# EAGLE board MOSFET_Driver_8_24_2505D (EAGLE 6.1)
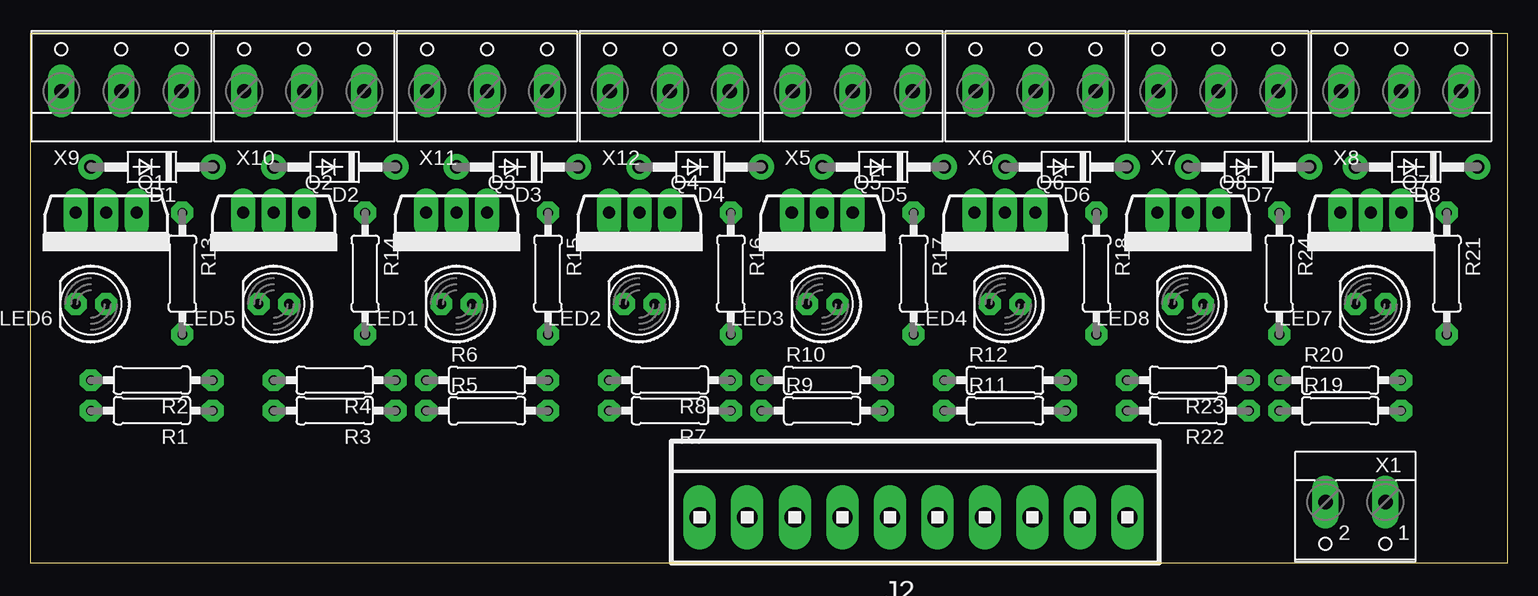
[diagram p0: board, top side]
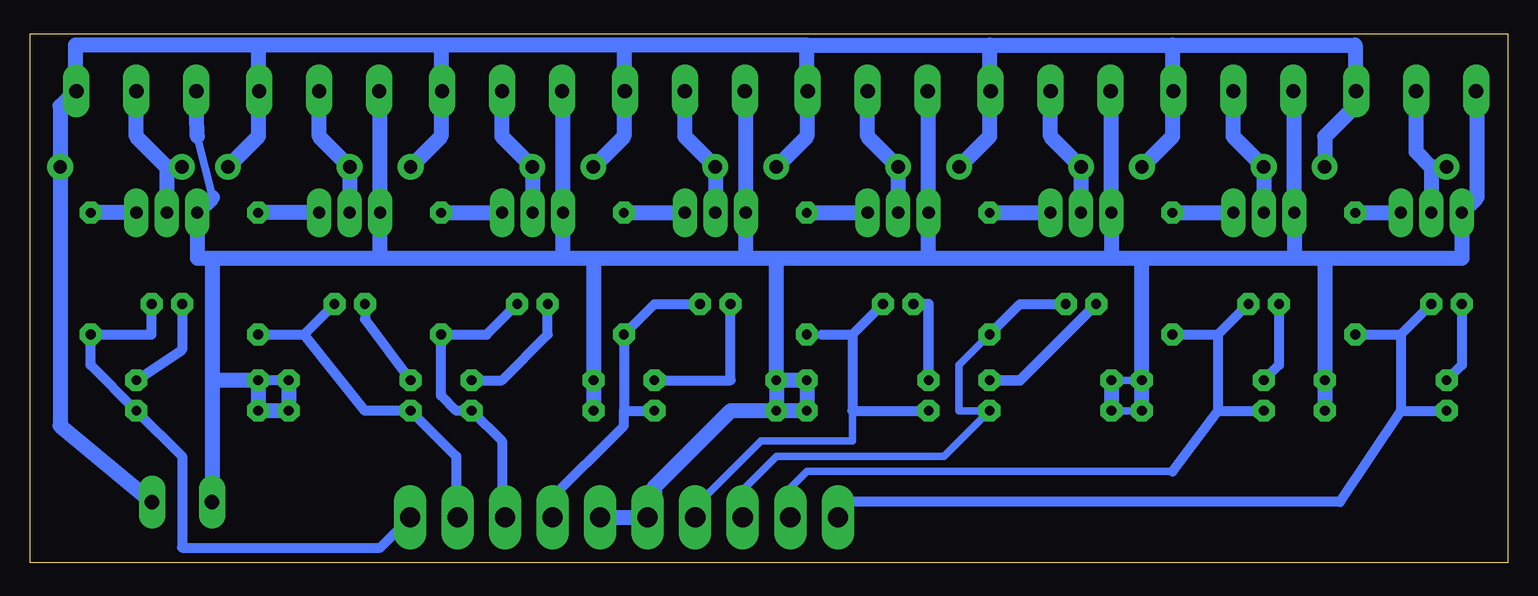
[diagram p1: board, bottom side, seen from below]

Size 123.17 x 44.12 mm. Coordinates in mm from the lower left corner, seen from the top.
Outline: 0,0 123.17,0 123.17,44.12 0,44.12 0,0
Copper layers (1*16): Top 0.035mm / dielectric 1.5mm / Bottom 0.035mm
Design rules: minimum track width 35mil, minimum drill 35mil, track to track 8mil, track to pad 8mil, pad to pad 8mil, via to via 8mil, smd to smd 8mil, copper to edge 40mil, drill to drill 8mil, minimum pad ring 20mil, minimum via ring 8mil, stop-mask expansion 4mil, vias tented up to drill 0mil, thermal gap 10mil

## Footprints (pad centres in the part's own frame; a part is rotated, then mirrored left to right if it is on the bottom)
DO41-10 = drill 1.118: A 5.08,0; C -5.08,0
1X10MTA = drill 1.676 long: 1 17.831,0; 2 13.868,0; 3 9.906,0; 4 5.944,0; 5 1.981,0; 6 -1.981,0; 7 -5.944,0; 8 -9.906,0; 9 -13.868,0; 10 -17.831,0
LED5MM = drill 0.813 octagon: A -1.27,0; K 1.27,0
TO262-V = drill 1.016 long: 1 -2.54,0; 2 0,0; 3 2.54,0
0207/10 = drill 0.813 octagon: 1 -5.08,0; 2 5.08,0
W237-102 = drill 1.194 long: 1 -2.5,-1.27; 2 2.5,-1.27
W237-103 = drill 1.194 long: 1 -5,-1.29; 2 0,-1.29; 3 5,-1.29

## Placement (x,y rotation side)
D1  1N4004  [DO41-10]  10.16,33.02 180 top
D2  1N4004  [DO41-10]  25.4,33.02 180 top
D3  1N4004  [DO41-10]  40.64,33.02 180 top
D4  1N4004  [DO41-10]  55.88,33.02 180 top
D5  1N4004  [DO41-10]  71.12,33.02 180 top
D6  1N4004  [DO41-10]  86.36,33.02 180 top
D7  1N4004  [DO41-10]  101.6,33.02 180 top
D8  1N4004  [DO41-10]  115.57,33.02 180 top
J2  [1X10MTA]  73.66,3.81 0 top
LED1  [LED5MM]  35.56,21.59 180 top
LED2  [LED5MM]  50.8,21.59 180 top
LED3  [LED5MM]  66.04,21.59 180 top
LED4  [LED5MM]  81.28,21.59 180 top
LED5  [LED5MM]  20.32,21.59 180 top
LED6  [LED5MM]  5.08,21.59 180 top
LED7  [LED5MM]  111.76,21.59 180 top
LED8  [LED5MM]  96.52,21.59 180 top
Q1  IRF3704L-V  [TO262-V]  6.35,29.21 180 top
Q2  IRF3704L-V  [TO262-V]  20.32,29.21 180 top
Q3  IRF3704L-V  [TO262-V]  35.56,29.21 180 top
Q4  IRF3704L-V  [TO262-V]  50.8,29.21 180 top
Q5  IRF3704L-V  [TO262-V]  66.04,29.21 180 top
Q6  IRF3704L-V  [TO262-V]  81.28,29.21 180 top
Q7  IRF3704L-V  [TO262-V]  111.76,29.21 180 top
Q8  IRF3704L-V  [TO262-V]  96.52,29.21 180 top
R1  [0207/10]  10.16,12.7 180 top
R2  [0207/10]  10.16,15.24 180 top
R3  [0207/10]  25.4,12.7 180 top
R4  [0207/10]  25.4,15.24 180 top
R5  [0207/10]  38.1,12.7 0 top
R6  [0207/10]  38.1,15.24 0 top
R7  [0207/10]  53.34,12.7 180 top
R8  [0207/10]  53.34,15.24 180 top
R9  [0207/10]  66.04,12.7 0 top
R10  [0207/10]  66.04,15.24 0 top
R11  [0207/10]  81.28,12.7 0 top
R12  [0207/10]  81.28,15.24 0 top
R13  [0207/10]  12.7,24.13 270 top
R14  [0207/10]  27.94,24.13 270 top
R15  [0207/10]  43.18,24.13 270 top
R16  [0207/10]  58.42,24.13 270 top
R17  [0207/10]  73.66,24.13 270 top
R18  [0207/10]  88.9,24.13 270 top
R19  [0207/10]  109.22,12.7 0 top
R20  [0207/10]  109.22,15.24 0 top
R21  [0207/10]  118.11,24.13 270 top
R22  [0207/10]  96.52,12.7 180 top
R23  [0207/10]  96.52,15.24 180 top
R24  [0207/10]  104.14,24.13 270 top
X1  [W237-102]  110.49,3.81 180 top
X5  [W237-103]  68.58,40.64 0 top
X6  [W237-103]  83.82,40.64 0 top
X7  [W237-103]  99.06,40.64 0 top
X8  [W237-103]  114.3,40.64 0 top
X9  [W237-103]  7.62,40.64 0 top
X10  [W237-103]  22.86,40.64 0 top
X11  [W237-103]  38.1,40.64 0 top
X12  [W237-103]  53.34,40.64 0 top

## Library data of the parts
D1-D8 = diode
J2 = con-amp
LED1-LED8 = led
Q1-Q8 = transistor-power
R1-R24 = resistor
X1 X5-X12 = con-wago-500

## Nets
N$1: J2.10 LED6.A R1.2 R13.2
N$2: LED6.K R2.2
N$3: D1.A Q1.2 X9.2
N$4: J2.1 LED7.A R19.2 R21.2
N$5: LED7.K R20.2
N$6: D3.A Q3.2 X11.2
N$7: D2.A Q2.2 X10.2
N$8: D4.A Q4.2 X12.2
N$9: D5.A Q5.2 X5.2
N$10: D6.A Q6.2 X6.2
N$11: J2.9 LED5.A R3.2 R14.2
N$12: J2.8 LED1.A R5.2 R15.2
N$13: J2.7 LED2.A R7.2 R16.2
N$14: J2.4 LED3.A R9.2 R17.2
N$15: J2.3 LED4.A R11.2 R18.2
N$16: Q1.1 R13.1
N$17: Q2.1 R14.1
N$18: Q3.1 R15.1
N$19: LED5.K R4.2
N$20: LED1.K R6.2
N$21: LED2.K R8.2
N$22: LED3.K R10.2
N$23: LED4.K R12.2
N$24: Q4.1 R16.1
N$25: D1.C D2.C D3.C D4.C D5.C D6.C D7.C D8.C X1.1 X5.3 X6.3 X7.3 X8.3 X9.3 X10.3 X11.3 X12.3
N$26: Q5.1 R17.1
N$27: Q6.1 R18.1
N$28: J2.5 J2.6 Q1.3 Q2.3 Q3.3 Q4.3 Q5.3 Q6.3 Q7.3 Q8.3 R1.1 R2.1 R3.1 R4.1 R5.1 R6.1 R7.1 R8.1 R9.1 R10.1 R11.1 R12.1 R19.1 R20.1 R22.1 R23.1 X1.2 X5.1 X6.1 X7.1 X8.1 X9.1 X10.1 X11.1 X12.1
N$29: D8.A Q7.2 X8.2
N$31: Q7.1 R21.1
N$33: J2.2 LED8.A R22.2 R24.2
N$34: LED8.K R23.2
N$35: D7.A Q8.2 X7.2
N$37: Q8.1 R24.1

## Tracks (layer width: path | path; a pad name or v marks a point on that pad's centre or on a via)
N$1
  Bottom 0.254: 55.88,3.81 J2.10
  Bottom 0.61: 55.88,5.08 55.88,3.81
  Bottom 0.813: R13.2 8.89,19.05 | 8.89,19.05 8.89,12.7 | 8.89,12.7 R1.2 | 8.89,19.05 LED6.A | 55.88,5.08 13.97,5.08 8.89,12.7
N$2
  Bottom 0.813: R2.2 3.81,16.51 LED6.K
N$3
  Bottom 1.27: 6.35,33.02 Q1.2 | D1.A 6.35,33.02 | X9.2 7.62,34.29 6.35,33.02
N$4
  Bottom 0.254: 91.44,3.81 J2.1
  Bottom 0.813: 91.44,3.81 93.98,1.27 110.49,1.27 110.49,8.89 R19.2 118.11,16.51 R21.2 113.03,19.05 LED7.A
N$5
  Bottom 0.813: R20.2 110.49,17.78 LED7.K
N$6
  Bottom 1.27: Q3.2 D3.A 38.1,35.56 X11.2
N$7
  Bottom 1.27: Q2.2 D2.A 22.86,35.56 X10.2
N$8
  Bottom 1.27: Q4.2 D4.A 53.34,35.56 X12.2
N$9
  Bottom 1.27: Q5.2 D5.A 68.58,35.56 X5.2
N$10
  Bottom 1.27: Q6.2 D6.A 83.82,35.56 X6.2
N$11
  Bottom 0.61: 27.94,7.62 58.42,7.62 59.69,6.35 J2.9
  Bottom 0.813: R14.2 24.13,19.05 | 24.13,19.05 24.13,12.7 | 24.13,12.7 R3.2 | 24.13,19.05 LED5.A | 24.13,12.7 27.94,7.62
N$12
  Bottom 0.61: R15.2 45.72,16.51 45.72,12.7 R5.2 46.99,8.89 60.96,8.89 63.5,6.35 J2.8
  Bottom 0.813: LED1.A 40.64,21.59 R15.2
N$13
  Bottom 0.254: R16.2 57.15,19.05 | 67.31,3.81 J2.7
  Bottom 0.61: 67.31,3.81 67.31,5.08 62.23,10.16 54.61,10.16 54.61,12.7
  Bottom 0.813: 54.61,19.05 54.61,12.7 R7.2 | 54.61,19.05 LED2.A | 57.15,19.05 54.61,19.05
N$14
  Bottom 0.254: 80.01,3.81 J2.4
  Bottom 0.813: 73.66,12.7 R17.2 71.12,21.59 LED3.A | 73.66,12.7 73.66,11.43 80.01,5.08 80.01,3.81 | 73.66,12.7 R9.2
N$15
  Bottom 0.254: 83.82,3.81 J2.3
  Bottom 0.813: 83.82,3.81 83.82,10.16 R11.2 87.63,12.7 88.9,13.97 R18.2 85.09,19.05 LED4.A
N$16
  Bottom 1.27: R13.1 Q1.1
N$17
  Bottom 1.27: R14.1 Q2.1
N$18
  Bottom 1.27: R15.1 Q3.1
N$19
  Bottom 0.813: R4.2 19.05,16.51 LED5.K
N$20
  Bottom 0.889: LED1.K 40.64,15.24 R6.2
N$21
  Bottom 0.889: R8.2 48.26,21.59 LED2.K
N$22
  Bottom 0.813: LED3.K 64.77,15.24 R10.2
N$23
  Bottom 0.813: R12.2 83.82,15.24 80.01,19.05 LED4.K
N$24
  Bottom 1.27: R16.1 Q4.1
N$25
  Bottom 0.254: 113.03,5.08 X1.1 | 12.7,39.37 X9.3 12.7,38.1 | 58.42,39.37 X12.3 58.42,38.1 | 73.66,39.37 X5.3 73.66,38.1 | 88.9,39.37 X6.3 88.9,38.1 | 27.94,39.37 X10.3 27.94,38.1 | 43.18,39.37 X11.3 | 104.14,39.37 X7.3 104.14,38.1 | 119.38,39.37 X8.3
  Bottom 1.27: 113.03,5.08 120.65,11.43 D8.C 120.65,38.1 119.38,39.37 119.38,43.18 104.14,43.18 | 12.7,39.37 12.7,43.18 27.94,43.18 | 43.18,43.18 43.18,39.37 43.18,35.56 D3.C | 58.42,43.18 43.18,43.18 | 58.42,39.37 58.42,43.18 | 73.66,43.18 73.66,39.37 | 58.42,43.18 73.66,43.18 | 88.9,43.18 88.9,39.37 | 73.66,43.18 88.9,43.18 | 27.94,43.18 27.94,39.37 | 43.18,43.18 27.94,43.18 | 88.9,43.18 104.14,43.18 | D1.C 15.24,35.56 12.7,38.1 | D2.C 27.94,35.56 27.94,38.1 | D4.C 58.42,35.56 58.42,38.1 | D5.C 73.66,35.56 73.66,38.1 | D6.C 88.9,35.56 88.9,38.1 | 104.14,43.18 104.14,39.37 | D7.C 104.14,35.56 104.14,38.1
N$26
  Bottom 1.27: R17.1 Q5.1
N$27
  Bottom 1.27: R18.1 Q6.1
N$28
  Bottom 0.254: 2.54,38.1 X9.1 | 17.78,38.1 X10.1 | 33.02,38.1 X11.1 | 48.26,38.1 X12.1 | 63.5,38.1 X5.1 | 78.74,38.1 X6.1 | 93.98,38.1 X7.1 | 71.12,3.81 J2.6 | 107.95,5.08 X1.2
  Bottom 0.61: 107.95,30.48 109.22,35.56 | R5.1 R3.1 | R4.1 R6.1
  Bottom 0.813: R23.1 R20.1
  Bottom 1.27: 2.54,38.1 2.54,30.48 Q1.3 3.81,25.4 15.24,25.4 | R1.1 R2.1 15.24,25.4 | R6.1 R5.1 | 15.24,25.4 17.78,25.4 | 17.78,25.4 30.48,25.4 | 30.48,25.4 33.02,25.4 | 33.02,25.4 48.26,25.4 | 48.26,25.4 60.96,25.4 | 60.96,25.4 63.5,25.4 | 63.5,25.4 76.2,25.4 | 76.2,25.4 78.74,25.4 | 78.74,25.4 93.98,25.4 | 93.98,25.4 107.95,25.4 | 107.95,25.4 109.22,25.4 Q7.3 107.95,30.48 | 48.26,25.4 Q4.3 48.26,38.1 | 63.5,25.4 Q5.3 63.5,38.1 | 78.74,25.4 Q6.3 78.74,38.1 | 93.98,25.4 Q8.3 93.98,38.1 | 17.78,25.4 Q2.3 17.78,38.1 | 33.02,25.4 Q3.3 33.02,38.1 | 109.22,35.56 X8.1 | R3.1 R4.1 30.48,25.4 | R10.1 60.96,25.4 | 107.95,5.08 107.95,15.24 | 107.95,15.24 107.95,25.4 | R11.1 R12.1 76.2,25.4 | R9.1 64.77,12.7 71.12,6.35 71.12,3.81 J2.5 | R10.1 R8.1 R7.1 R9.1 | R23.1 R22.1 R19.1 R20.1 107.95,15.24 | R10.1 R9.1
N$29
  Bottom 1.27: 111.76,33.02 Q7.2 | D8.A 111.76,33.02 | X8.2 114.3,35.56 111.76,33.02
N$31
  Bottom 1.27: Q7.1 R21.1
N$33
  Bottom 0.254: 87.63,3.81 J2.2
  Bottom 0.813: 87.63,3.81 87.63,8.89 R22.2 95.25,12.7 100.33,19.05 | 100.33,19.05 LED8.A | R24.2 100.33,19.05
N$34
  Bottom 0.813: R23.2 95.25,20.32 LED8.K
N$35
  Bottom 1.27: Q8.2 D7.A 99.06,35.56 X7.2
N$37
  Bottom 1.27: Q8.1 R24.1